# EAGLE board Rover Motor Controller R3 (EAGLE 7.2.0)
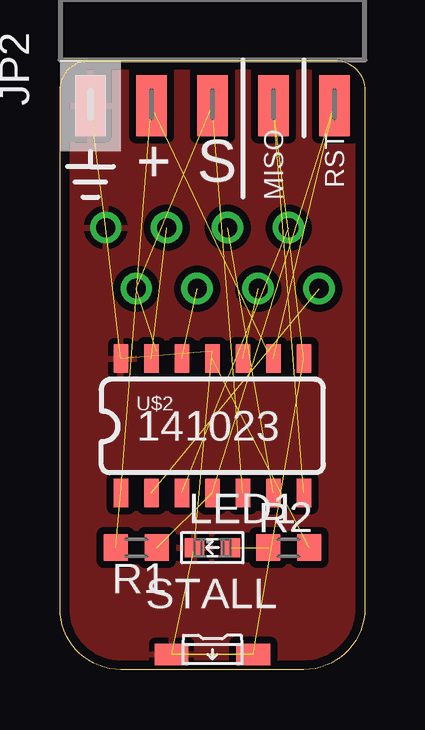
[diagram p0: board, top side]
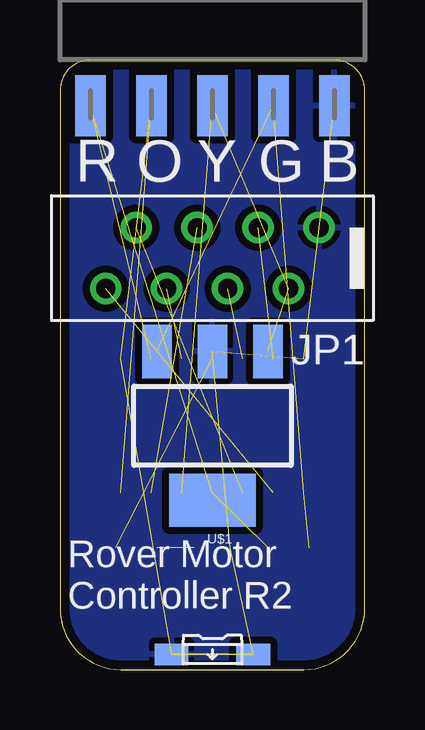
[diagram p1: board, bottom side, seen from below]

Size 12.7 x 25.4 mm. Coordinates in mm from the lower left corner, seen from the top.
Outline: 12.7,24.13 12.7,2.54 arc-90 10.16,0 2.54,0 arc-90 0,2.54 0,24.13 arc-90 1.27,25.4 11.43,25.4 arc-90 12.7,24.13
Copper layers (1*16): Top 0.035mm / dielectric 1.5mm / Bottom 0.035mm
Design rules "2-Layer DRC *": minimum track width 10mil, minimum drill 13mil, track to track 6mil, track to pad 6mil, pad to pad 6mil, via to via 6mil, smd to smd 6mil, copper to edge 15mil, drill to drill 6mil, minimum pad ring 10mil, minimum via ring 7mil, stop-mask expansion 0mil, vias tented up to drill 16mil, thermal gap 10mil
vRestrict: area 10.8,20.1 to 12.1,22.1; area 3.2,20.3 to 4.4,22.1; area 3.6,2.5 to 9.1,3.8; area 0.6,20.3 to 1.9,22.1

## Footprints (pad centres in the part's own frame; a part is rotated, then mirrored left to right if it is on the bottom)
M-08-MICRO-MATCH-PTH = drill 0.8 pad 1.27: 1 -4.445,-1.27; 2 -3.175,1.27; 3 -1.905,-1.27; 4 -0.635,1.27; 5 0.635,-1.27; 6 1.905,1.27; 7 3.175,-1.27; 8 4.445,1.27
M-2X05-0.1-EDGE = smd 2.54 x 1.27: 1 0,5.08; 3 0,2.54; 5 0,0; 7 0,-2.54; 9 0,-5.08 | smd 2.54 x 1.27 bottom: 2 0,5.08; 4 0,2.54; 6 0,0; 8 0,-2.54; 10 0,-5.08
SML0603 = smd 0.8 x 0.8: A 0.75,0; C -0.75,0
LED-SMD-RA = smd 1.4 x 0.9: A 1.7,0; C -1.7,0
R0603 = smd 1 x 1.1: 1 -0.85,0; 2 0.85,0
SOT223 = smd 1.219 x 2.235: 1 -2.311,-3.099; 2 0,-3.099; 3 2.311,-3.099 | smd 3.6 x 2.2: 4 0,3.099
SO14 = smd 0.6 x 1.2: 1 -3.81,-2.8; 2 -2.54,-2.8; 3 -1.27,-2.8; 4 0,-2.8; 5 1.27,-2.8; 6 2.54,-2.8; 7 3.81,-2.8; 8 3.81,2.8; 9 2.54,2.8; 10 1.27,2.8; 11 0,2.8; 12 -1.27,2.8; 13 -2.54,2.8; 14 -3.81,2.8

## Placement (x,y rotation side)
JP1  M-08-MICRO-MATCHPTH  [M-08-MICRO-MATCH-PTH]  6.35,17.14 180 bottom
JP2  M-2X05EDGE  [M-2X05-0.1-EDGE]  6.35,23.5 90 top
LED1  Red  [SML0603]  6.35,5.08 0 top
LED2  White  [LED-SMD-RA]  6.35,0.64 0 top
LED3  White  [LED-SMD-RA]  6.35,0.64 0 bottom
R1  10k  [R0603]  3.17,5.08 180 top
R2  100  [R0603]  9.53,5.08 0 top
U$1  V_REG_MIC2920  [SOT223]  6.35,10.16 180 bottom
U$2  ATTINY84  [SO14]  6.35,10.16 0 top

## Library data of the parts
JP1 JP2 LED2 LED3 R1 R2 = Jordi
LED1 = led
U$1 = SparkFun-PowerIC
U$2 = SparkFun-DigitalIC

## Nets
+3V3: JP2.4 R1.2 U$2.1
+5V: JP2.3 U$1.3
GND: JP1.1 JP2.1 JP2.2 LED1.C LED2.C LED3.C U$1.2 U$2.14
IN1: JP1.3 U$2.13
IN2: JP1.4 U$2.12
MISO: JP2.7 LED2.A LED3.A U$2.8
N$1: LED1.A R2.1
PWM: JP1.5 U$2.6
QEA: JP1.7 U$2.3
QEB: JP1.8 U$2.2
RST: JP2.9 R1.1 U$2.4
SCL: JP2.10 U$2.9
SDA: JP2.8 U$2.7
SERVO: JP2.5 U$2.5
STALL: R2.2 U$2.11
STANDBY: JP1.6 U$2.10
VCC: JP1.2 JP2.6 U$1.1

## Tracks (layer width: path | path; a pad name or v marks a point on that pad's centre or on a via)
+3V3  (2 unrouted)
+5V  (1 unrouted)
GND  (7 unrouted)
  pour Bottom (isolate 0.305): 12.7,24.13 12.7,2.54 arc-90 10.16,0 2.54,0 arc-90 0,2.54 0,24.13 arc-90 1.27,25.4 11.43,25.4 arc-90
  pour Top (isolate 0.305): 10.16,0 2.54,0 arc-90 0,2.54 0,24.13 arc-90 1.27,25.4 11.43,25.4 arc-90 12.7,24.13 12.7,2.54 arc-90
IN1  (1 unrouted)
IN2  (1 unrouted)
MISO  (3 unrouted)
N$1  (1 unrouted)
PWM  (1 unrouted)
QEA  (1 unrouted)
QEB  (1 unrouted)
RST  (2 unrouted)
SCL  (1 unrouted)
SDA  (1 unrouted)
SERVO  (1 unrouted)
STALL  (1 unrouted)
STANDBY  (1 unrouted)
VCC  (2 unrouted)

## Text on the board
_tsilk: + | S | MISO | RST | 141023 | STALL
_bsilk: B | G | Y | O | R | Rover Motor / Controller R2